# EAGLE board GSRv3.1 (EAGLE 7.4.0)
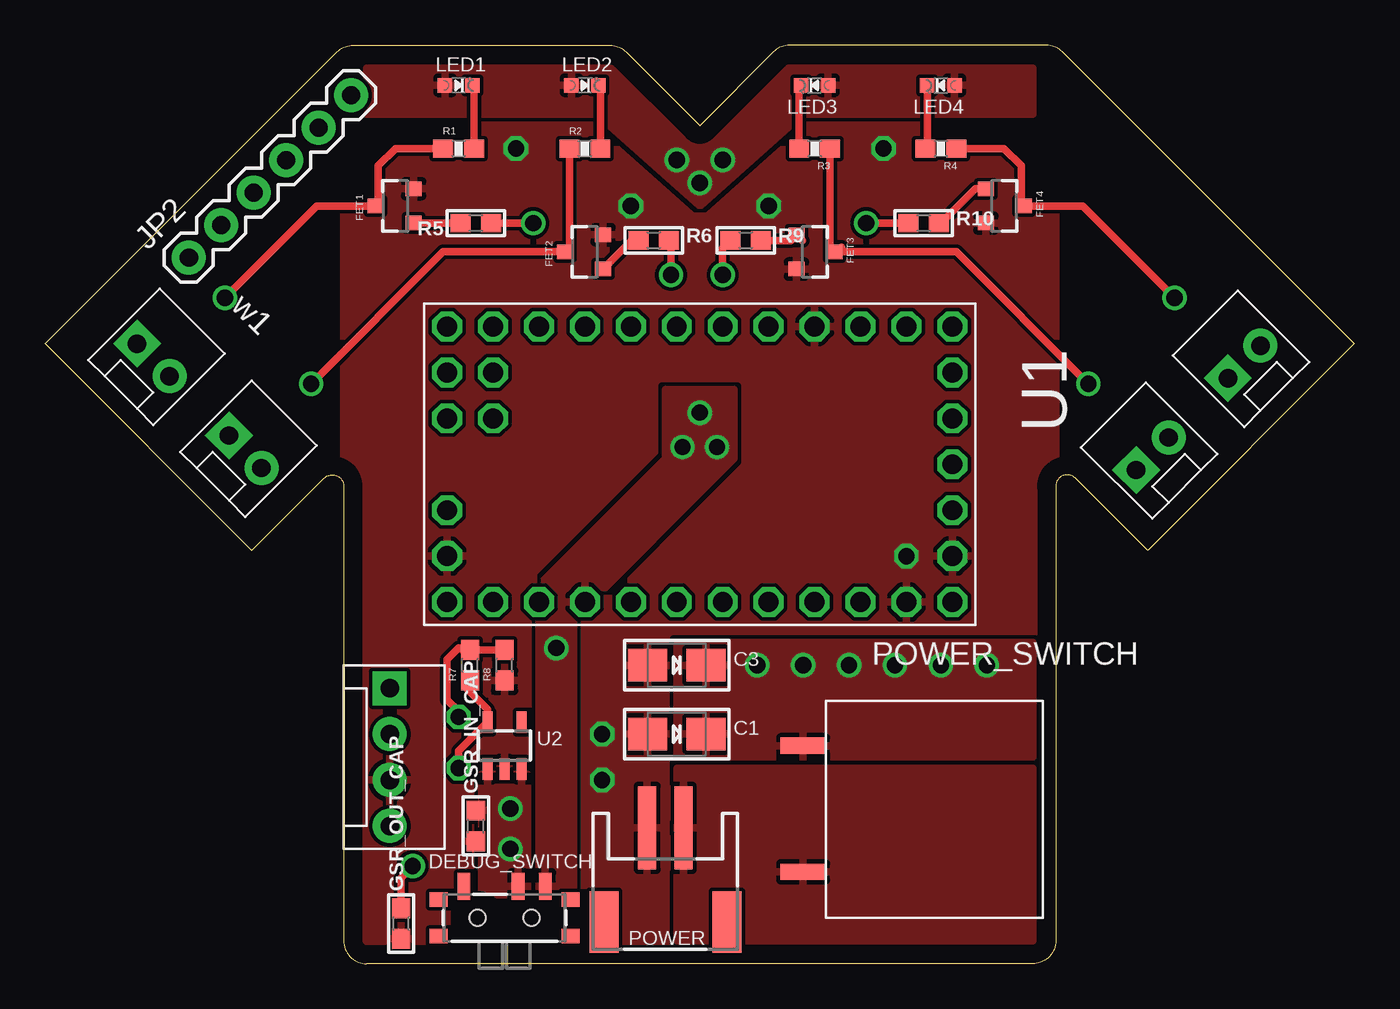
[diagram p0: board, top side]
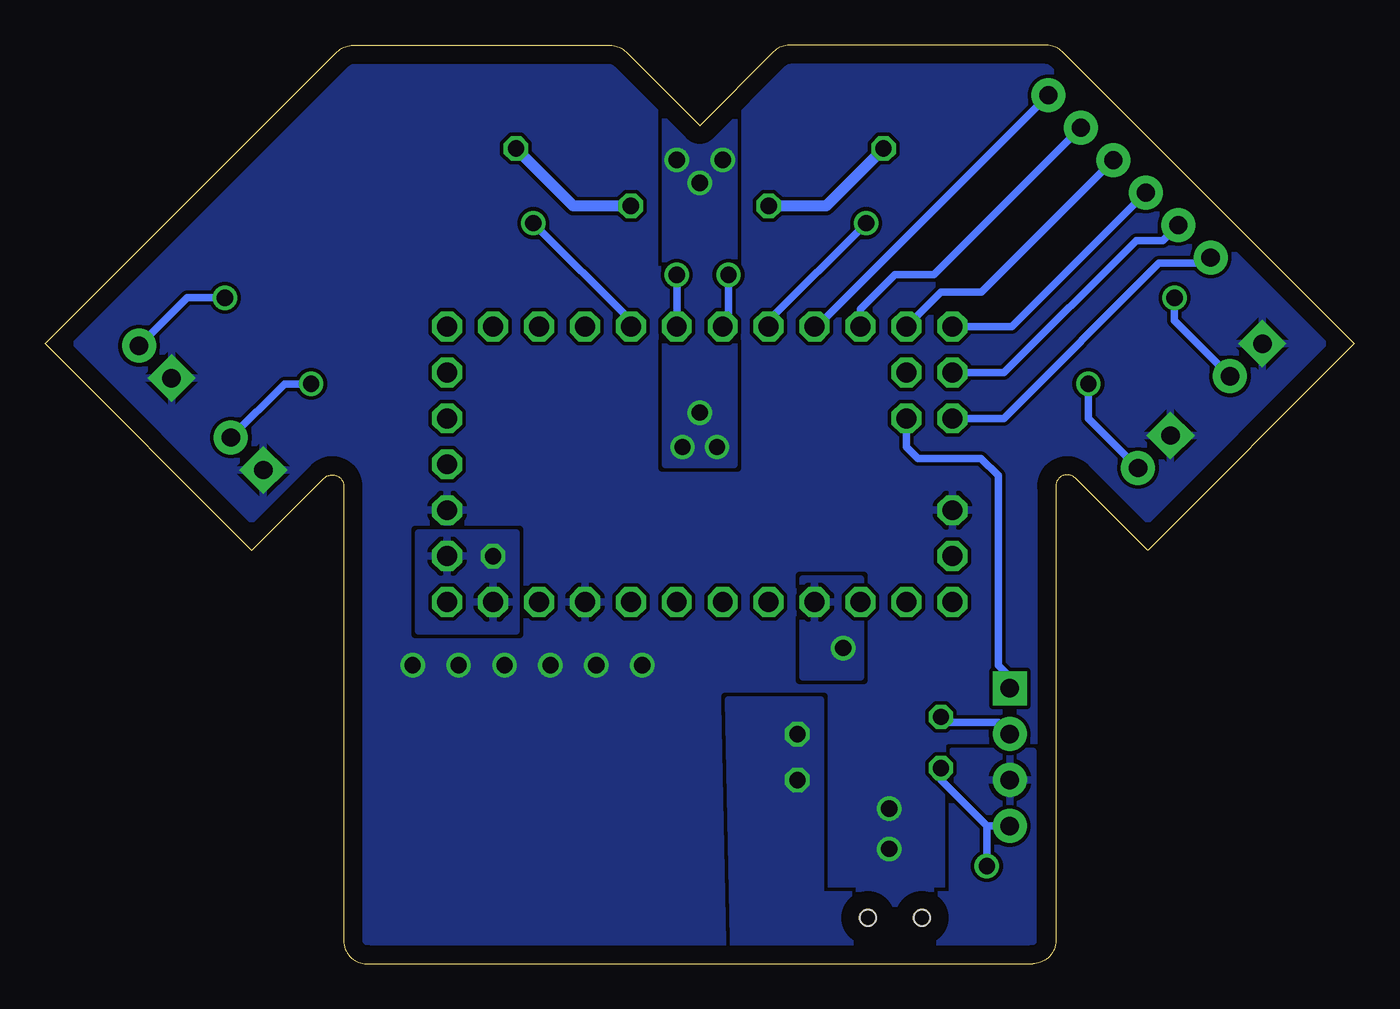
[diagram p1: board, bottom side, seen from below]

Size 72.39 x 50.8 mm. Coordinates in mm from the lower left corner, seen from the top.
Outline: 56.96,26.86 arc135 55.88,26.41 55.88,1.27 arc-90 54.61,0 17.78,0 arc-90 16.51,1.27 16.51,26.41 arc135 15.43,26.86 11.43,22.86 0,34.29 16.14,50.43 arc-45 17.04,50.8 31.22,50.8 arc-45 32.12,50.43 36.2,46.36 40.27,50.43 arc-45 41.17,50.8 55.35,50.8 arc-45 56.25,50.43 72.39,34.29 60.96,22.86 56.96,26.86
Copper layers (1*16): Top 0.035mm / dielectric 1.5mm / Bottom 0.035mm
Design rules "default": minimum track width 10mil, minimum drill 24mil, track to track 8mil, track to pad 8mil, pad to pad 8mil, via to via 8mil, smd to smd 8mil, copper to edge 40mil, drill to drill 8mil, minimum pad ring 10mil, minimum via ring 8mil, stop-mask expansion 4mil, vias tented up to drill 0mil, thermal gap 10mil

## Footprints (pad centres in the part's own frame; a part is rotated, then mirrored left to right if it is on the bottom)
EIA3528-21/B-W = smd 2.15 x 1.8: + 1.625,0; - -1.625,0
SPST_SMT_19192 = smd 0.7 x 1.5: A -2.25,1.75; B 0.75,1.75; C 2.25,1.75 | smd 1 x 0.8: GND1 -3.65,1; GND2 -3.65,-1; GND3 3.65,1; GND4 3.65,-1 | hole 0.9: -1.5,0; 1.5,0
SOT23-3 = smd 0.8 x 0.9: 1 -0.95,-1; 2 0.95,-1; 3 0,1.1
0603 = smd 1.1 x 1: 1 -0.85,0; 2 0.85,0
MOLEX-1X4 = drill 1.016 pad 1.88 square: 1 0,0 | drill 1.016 pad 1.88: 2 2.54,0; 3 5.08,0; 4 7.62,0
1X06 = drill 1.016 pad 1.88: 1 0,0; 2 2.54,0; 3 5.08,0; 4 7.62,0; 5 10.16,0; 6 12.7,0
CHIPLED_0603_NOOUTLINE = smd 0.8 x 0.8: A 0,-0.75; C 0,0.75
JSTPH2 = smd 1 x 4.6: 1 -1,-3.7; 2 1,-3.7 | smd 1.6 x 3.4: NC1 -3.4,1.5; NC2 3.4,1.5
PUSH_BUTTON = smd 2.5 x 0.9: PIN1 -13.97,-0.644; PIN2 -13.97,-7.62
0603-RES = smd 1.1 x 1: 1 -0.85,0; 2 0.85,0
ARDUINO_MINI = drill 1.1 octagon: 5V@1 2.54,15.24; 5V@2 7.62,7.62; 5V@3 2.54,-12.7; 9V 7.62,15.24; A0 7.62,-2.54; A1 7.62,0; A2 7.62,2.54; A3 7.62,5.08; A4 -5.08,-12.7; A5 -2.54,-12.7; A6 -5.08,-10.16; A7 -2.54,-10.16; D2 -7.62,5.08; D3 -7.62,2.54; D4 -7.62,0; D5 -7.62,-2.54; D6 -7.62,-5.08; D7 -7.62,-7.62; D8 -7.62,-10.16; D9 -7.62,-12.7; D10 7.62,-12.7; D11 7.62,-10.16; D12 7.62,-7.62; D13 7.62,-5.08; GND@1 -7.62,7.62; GND@2 5.08,15.24; GND@3 7.62,12.7; GND@4 5.08,-12.7; RST@1 -7.62,10.16; RST@2 -5.08,15.24; RST@3 7.62,10.16; RX@1 -7.62,12.7; RX@2 0,15.24; TX@1 -7.62,15.24; TX@2 -2.54,15.24
SOT23-5 = smd 0.55 x 1.2: 1 -0.95,-1.3; 2 0,-1.3; 3 0.95,-1.3; 4 0.95,1.3; 5 -0.95,1.3
MOLEX-1X2 = drill 1.016 pad 1.88 square: 1 0,0 | drill 1.016 pad 1.88: 2 2.54,0

## Placement (x,y rotation side)
C1  47uF  [EIA3528-21/B-W]  34.93,12.7 0 top
C3  47uF  [EIA3528-21/B-W]  34.93,16.51 0 top
DEBUG_SWITCH  [SPST_SMT_19192]  25.4,2.54 0 top
FET1  MPSA42  [SOT23-3]  19.37,41.91 90 top
FET2  MPSA42  [SOT23-3]  29.84,39.37 90 top
FET3  MPSA42  [SOT23-3]  42.55,39.37 270 top
FET4  MPSA42  [SOT23-3]  53.02,41.91 270 top
GSR_IN_CAP  1uF  [0603]  23.81,7.62 90 top
GSR_OUT_CAP  1uF  [0603]  19.69,2.22 90 top
JP1  [MOLEX-1X4]  19.05,15.24 270 top
JP2  [1X06]  7.94,39.05 45 top
LED1  [CHIPLED_0603_NOOUTLINE]  22.86,48.58 270 top
LED2  [CHIPLED_0603_NOOUTLINE]  29.84,48.58 270 top
LED3  [CHIPLED_0603_NOOUTLINE]  42.55,48.58 90 top
LED4  [CHIPLED_0603_NOOUTLINE]  49.53,48.58 90 top
POWER  [JSTPH2]  34.29,3.81 180 top
POWER_SWITCH  PUSH_BUTTON  [PUSH_BUTTON]  55.88,12.7 0 top
R1  330  [0603-RES]  22.86,45.09 0 top
R2  330  [0603-RES]  29.84,45.09 0 top
R3  330  [0603-RES]  42.55,45.09 180 top
R4  330  [0603-RES]  49.53,45.09 180 top
R5  1K  [0603]  23.81,40.96 180 top
R6  1K  [0603]  33.66,40.01 0 top
R7  1K  [0603]  23.49,16.51 90 top
R8  1K  [0603]  25.4,16.51 90 top
R9  1K  [0603]  38.73,40.01 0 top
R10  1K  [0603]  48.58,40.96 0 top
U1  ARDUINO_MINI  [ARDUINO_MINI]  34.93,27.62 270 top
U2  [SOT23-5]  25.4,12.06 0 top
WIRE1  [MOLEX-1X2]  5.08,34.29 315 top
WIRE2  [MOLEX-1X2]  10.16,29.21 315 top
WIRE3  [MOLEX-1X2]  60.33,27.3 45 top
WIRE4  [MOLEX-1X2]  65.41,32.38 45 top

## Library data of the parts
C1 C3 DEBUG_SWITCH GSR_IN_CAP GSR_OUT_CAP LED1-LED4 POWER R5 R6 R9 R10 U2 = microbuilder
FET1-FET4 = SparkFun-DiscreteSemi; PROD_ID: TRANS-09116
JP1 WIRE1-WIRE4 = SparkFun-Connectors
JP2 = SparkFun-Connectors; PROD_ID: CONN-08437
POWER_SWITCH U1 = myParts
R1-R4 = SparkFun-Passives
R7 R8 = SparkFun-Resistors; PROD_ID: RES-08609

## Nets
9V: U1.9V
A0: JP2.1 U1.A5
A1: JP2.2 U1.A4
D0: JP2.3 U1.D9
D1: JP2.4 U1.D8
D2: JP2.5 U1.D7
D3: JP2.6 U1.D6
DEBUG_VCC: DEBUG_SWITCH.C LED1.A LED2.A LED3.A LED4.A U1.D13
FET1: R5.1 U1.D5
FET2: R6.2 U1.D4
FET3: R9.1 U1.D3
FET4: R10.1 U1.D2
GND: C1.- C3.- FET1.2 FET2.2 FET3.2 FET4.2 GSR_IN_CAP.1 GSR_OUT_CAP.1 JP1.3 POWER.2 R8.1 U1.GND@1 U1.GND@2 U1.GND@3 U1.GND@4 U2.2
GSR_SIG: JP1.1 U1.A7
GSR_VCC: GSR_OUT_CAP.2 JP1.4 R7.1 U2.5
GSR_VSS: JP1.2 R7.2 R8.2
N$1: LED1.C R1.2
N$2: LED2.C R2.2
N$3: LED3.C R3.2
N$4: LED4.C R4.2
N$5: FET1.1 R5.2
N$6: FET2.1 R6.1
N$7: FET3.1 R9.2
N$8: FET4.1 R10.2
VBAT: C1.+ C3.+ DEBUG_SWITCH.B GSR_IN_CAP.2 POWER_SWITCH.PIN1 U1.5V@1 U1.5V@2 U1.5V@3 U2.1 U2.3 WIRE1.1 WIRE2.1 WIRE3.1 WIRE4.1
VIN: POWER.1 POWER_SWITCH.PIN2
WIRE1: FET1.3 R1.1 WIRE1.2
WIRE2: FET2.3 R2.1 WIRE2.2
WIRE3: FET3.3 R3.1 WIRE3.2
WIRE4: FET4.3 R4.1 WIRE4.2

## Tracks (layer width: path | path; a pad name or v marks a point on that pad's centre or on a via)
A0
  Bottom 0.406: U1.A5 19.37,30.16 10.79,38.74 8.26,38.74 JP2.1
A1
  Bottom 0.406: U1.A4 19.37,32.7 12.06,40.01 10.58,40.01 JP2.2
D0
  Bottom 0.406: U1.D9 18.93,35.24 JP2.3
D1
  Bottom 0.406: U1.D8 22.86,37.15 20.62,37.15 JP2.4
D2
  Bottom 0.406: U1.D7 27.3,36.2 25.4,38.1 23.26,38.1 JP2.5
D3
  Bottom 0.406: U1.D6 29.71,35.24 JP2.6
DEBUG_VCC  (via drill 0.9)
  other vias: 36.2,30.48 35.24,28.57 37.15,28.57 36.2,43.18 34.93,44.45 37.47,44.45 28.26,17.46
  pour Bottom: 38.1,27.62 38.1,49.53 34.29,49.53 34.29,27.62
  pour Top: 36.2,41.91 41.91,46.99 54.61,46.99 54.61,49.53 17.78,49.53 17.78,46.99 30.48,46.99
  pour Top: 27.3,3.81 27.3,20.32 29.21,20.32 29.21,3.81
  pour Top: 34.29,31.75 38.1,31.75 38.1,27.94 29.21,19.05 26.67,19.05 26.67,20.32 34.29,27.94
  pour Bottom: 27.3,21.27 30.48,21.27 30.48,15.88 27.3,15.88
FET1  (via drill 0.9)
  Top 0.406: v26.99,40.96 R5.1
  Bottom 0.406: U1.D5 32.39,35.56 v26.99,40.96
FET2  (via drill 0.9)
  Top 0.406: v34.61,38.1 34.61,39.9 R6.2
  Bottom 0.406: U1.D4 34.61,35.24 v34.61,38.1
FET3  (via drill 0.9)
  Top 0.406: v37.47,38.1 37.47,39.59 R9.1
  Bottom 0.406: U1.D3 v37.47,38.1
FET4  (via drill 0.9)
  Top 0.406: v45.4,40.96 R10.1
  Bottom 0.406: U1.D2 40.01,35.56 v45.4,40.96
GND  (via drill 0.9)
  Bottom 0.61: v32.39,41.91 29.21,41.91 v26.03,45.09 | v40.01,41.91 43.18,41.91 v46.36,45.09
  other vias: 30.8,10.16 30.8,12.7 47.62,22.54
  pour Top (rank 3): 16.51,55.88 55.88,55.88 55.88,-8.89 16.51,-8.89
  pour Bottom: 17.78,11.75 22.23,11.75 22.23,3.81 29.53,3.81 29.53,14.61 34.61,14.61 34.29,0 17.78,0
  pour Bottom: 51.75,23.81 46.36,23.81 46.36,18.41 51.75,18.41
GSR_SIG
  Bottom 0.406: JP1.1 19.05,15.88 19.69,16.51 19.69,26.99 20.64,27.94 24.13,27.94 24.77,28.57 U1.A7
GSR_VCC  (via drill 0.9)
  Top 0.406: R7.1 23.18,15.34 24.45,14.07 U2.5 22.86,11.78 v22.86,10.82 | GSR_OUT_CAP.2 19.69,4.76 v20.32,5.4
  Bottom 0.406: 20.32,7.62 22.86,10.16 v22.86,10.82 | 20.32,7.62 JP1.4 | 20.32,7.62 v20.32,5.4
GSR_VSS  (via drill 0.9)
  Top 0.406: 23.08,17.36 R7.2 | R7.2 R8.2 | v22.86,13.65 22.86,13.97 22.23,14.61 22.23,16.83 22.86,17.46 23.39,17.46 R7.2
  Bottom 0.406: v22.86,13.65 22.54,13.33 19.69,13.33 JP1.2
N$1
  Top 0.406: R1.2 23.71,48.48 LED1.C
N$2
  Top 0.406: R2.2 30.7,48.48 LED2.C
N$3
  Top 0.406: R3.2 41.7,48.48 LED3.C
N$4
  Top 0.406: R4.2 48.78,45.19 LED4.C
N$5
  Top 0.406: R5.2 FET1.1
N$6
  Top 0.406: R6.1 32.43,40.01 FET2.1
N$7
  Top 0.406: 41.87,40.01 FET3.1 41.23,40.01 R9.2
N$8
  Top 0.406: R10.2 49.53,40.96 51.44,42.86 FET4.1
VBAT  (via drill 0.9)
  other vias: 25.72,8.57 25.72,6.35 44.45,16.51 41.91,16.51 39.37,16.51 46.99,16.51 49.53,16.51 52.07,16.51
  pour Bottom (rank 2): -3.81,54.61 80.01,54.61 80.01,-3.81 -3.81,-3.81
  pour Top: 54.61,17.78 34.93,17.78 34.93,11.43 54.61,11.43
  pour Top: 26.67,10.48 24.13,10.48 24.13,3.81 26.67,3.81
VIN
  pour Top: 54.61,10.79 34.93,10.79 34.93,1.27 54.61,1.27
WIRE1  (via drill 0.9)
  Top 0.406: v9.94,36.83 15.02,41.91 FET1.3 18.41,42.06 18.41,44.13 19.37,45.09 R1.1
  Bottom 0.406: v9.94,36.83 9.94,35.56 WIRE1.2
WIRE2  (via drill 0.9)
  Top 0.406: R2.1 29,39.62 FET2.3 22.01,39.37 v14.71,32.07
  Bottom 0.406: v14.71,32.07 14.71,30.16 WIRE2.2
WIRE3  (via drill 0.9)
  Top 0.406: 44.03,39.62 FET3.3 | FET3.3 50.38,39.37 v57.69,32.07 | R3.1 43.4,39.62 FET3.3
  Bottom 0.406: v57.69,32.07 59.16,32.07 WIRE3.2
WIRE4  (via drill 0.9)
  Top 0.406: v62.45,36.83 57.37,41.91 FET4.3 53.98,42.06 53.98,44.13 53.02,45.09 R4.1
  Bottom 0.406: v62.45,36.83 64.55,36.83 WIRE4.2

## Text on the board
tSilk: w1